# Altium PCB GN_main.PcbDoc
Units mm, origin at the board's own origin, x right, y up, seen from the top; angles counter-clockwise.
Board outline 10.29 x 24.43 mm, 2 copper layers (Top Layer, Bottom Layer), stack 1.071 mm thick; 9 components, 8 nets, 35 pads, 0 vias.
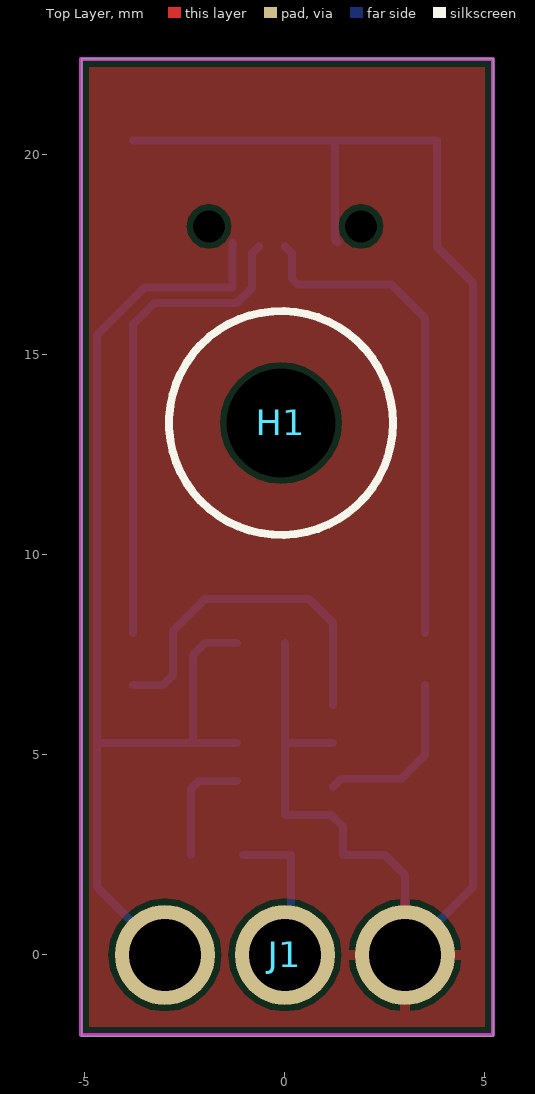
[diagram p0: Top Layer view]
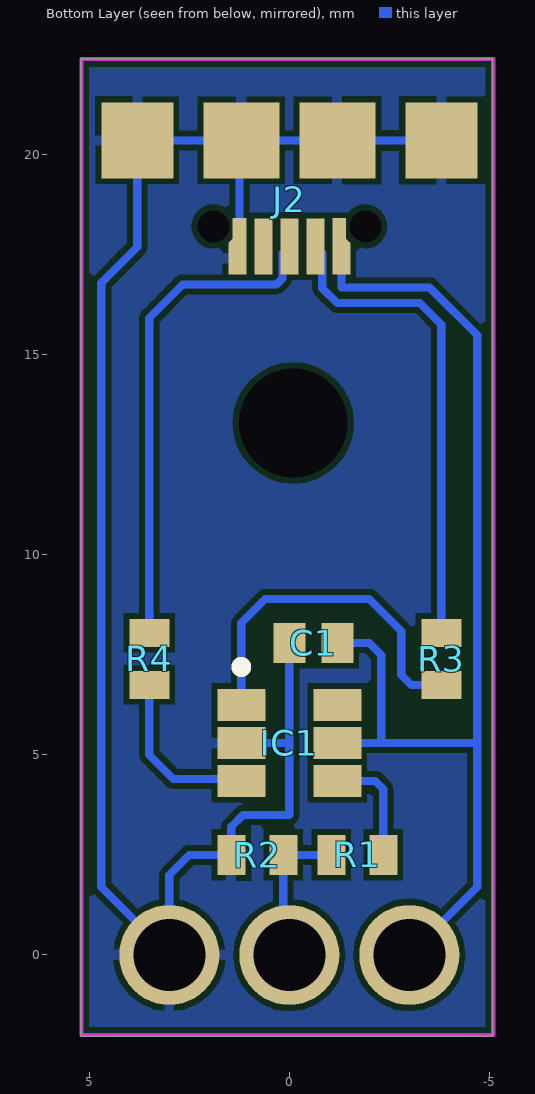
[diagram p1: Bottom Layer view, seen from below]

## Layer stack, top to bottom
Top Solder: solder mask 0.0102, Solder Resist, Dk 3.5
Top Layer: signal copper 0.0356
Dielectric1: core 1, FR-4, Dk 4.8
Bottom Layer: signal copper 0.0356
Bottom Solder: solder mask 0.0102, Solder Resist, Dk 3.5

## Board outline
-5.08,-2.032 -5.08,22.4 5.207,22.4 5.207,-2.032

## Design rules (kind name [scope] priority, off if disabled: settings)
Clearance [All] p1: gap=0.15
PolygonConnect [All] p1: connectstyle=Relief reliefconductorwidth=0.254 reliefentries=4 polygonreliefangle="90 Angle" airgapwidth=0.254
RoutingVias [All] p1: holewidth=0.635 width=1.016 viastyle="Through Hole" minholewidth=0.711 minwidth=1.27 maxholewidth=0.711 maxwidth=1.27
SilkToSolderMaskClearance SilkscreenOverComponentPads [IsPad] p1: minsilkscreentomaskgap=0.254 clearancetoexposedcopper=TRUE
SolderMaskExpansion [All] p1: expansion=0.102
UnpouredPolygon [All] p1: allowunpoured=FALSE
Width [All] p1: maxlimit=0.5 minlimit=0.15 preferedwidth=0.203 toplayer_prefwidth=0.2 bottomlayer_minwidth=0.203 bottomlayer_maxwidth=0.203 minimp=50.000000 maximp=50.000000 favimp=50.000000
28 further rules are at their usual default settings.

## Components (designator, comment, footprint, x,y, rotation, side; value= is the part's Value field where it differs from the comment)
C1 "C0603" C0603 -0.6,7.8 r0 bottom
H1 "MHole2.7mm-UNPLATED" MHole2_7mm-UNPLATED -0.1,13.3 r0 top
IC1 "Atmel AVR ATtiny10" SOT23-6 0,5.3 r180 bottom
J1 "GN_3Pin" GN_3PIN 0,0 r180 top locked
J2 "USB_micro_AB" USB_micro_AB 0,20.34 r0 bottom
R1 "R0603" R0603 -1.7,2.5 r180 bottom
R2 "R0603" R0603 0.8,2.5 r0 bottom
R3 "R0603" R0603 -3.8,7.4 r270 bottom
R4 "R0603" R0603 3.5,7.4 r90 bottom

## Footprints (in the part's own frame and the unit in brackets; to place one, negate y for a bottom-side part, rotate by r counter-clockwise, add the part's x,y. Pads: shape width x height; smd on the part's side, far side on the other; paste and mask are expansions set on the pad)
C0603 [mm]
  rect 0.8x1 smd: 1(-0.6,0) 2(0.6,0)
  body extent -0.87,-0.48 0.87,0.48, height 0.95
GN_3PIN [mm] "Galaxy Nexus 3Pin"
  round 2.5 hole 1.8: 1(-3,0) 2(0,0) 3(3,0)
  body extent -86.99,-9.33 48.51,3.05, height 72.39
MHole2_7mm-UNPLATED [mm]
  round 0 hole 2.72 unplated: 1(0,0)
  silkscreen extent -2.8,-2.8 2.8,2.8, body extent -2.75,-2.74 2.73,2.74, height 0.02
R0603 [mm]
  rect 0.7x1 smd: 1(-0.65,0) 2(0.65,0)
  body extent -0.82,-0.48 0.82,0.48, height 0.5
SOT23-6 [mm]
  rect 1.2x0.8 smd: 1(-1.2,0.95) 2(-1.2,0) 3(-1.2,-0.95) 4(1.2,-0.95) 5(1.2,0) 6(1.2,0.95)
  silkscreen extent -1.33,1.78 -1.08,2.02, body extent -1.5,-1.5 1.5,1.5, height 1.45
USB_micro_AB [mm]
  rect 0.3x0.3 smd rot 45: 1(-1.31,2.53) 5(1.31,2.53)
  rect 0.45x0.8 smd: 1(-1.3,2.925) 5(1.3,2.925)
  rect 0.34x1.4 smd: 1(-1.245,2.62) 5(1.245,2.62)
  rect 0.45x1.4 smd: 2(-0.65,2.625) 3(0,2.625) 4(0.65,2.625)
  rect 1.8x1.9 smd: 6(-3.8,-0.025) 6(3.8,-0.025)
  rect 1.9x1.9 smd: 6(-1.2,-0.025) 6(1.2,-0.025)
  round 0 hole 0.8 unplated mask+0.5: ""(-1.9,2.125) ""(1.9,2.125)
  body extent -3.97,-2.58 4.01,2.85, height 2.72

## Part data
C1: "capacitor"
H1: library part 22899, "MHole2.7mm-unplated"
IC1: library part ATtiny10, "ATtiny10"
J2: "5-pin Female SMT USB mini-AB (OTG) Receptacle Molex"
R1 R2 R3 R4: "Resistor"

## Nets (pads, with @x,y where several pads share a name; then routed paths per layer and width w, separated by ;. In a path a pad name is that pad's centre, name@x,y a point inside that pad or via, vN(x,y) a via of type N, cw(c..) or ccw(c..) an arc to the next point about the centre after c; other vN are vias at no path point)
GND: C1.2 IC1.2 J1.1 J2.5 J2.6 R2.2 | length 43.1
  Bottom Layer w0.203: J2.6@-3.8,20.365 J2.6@1.2,20.365 ; C1.2 0,3.5 1.155,3.5 1.45,3.205 R2.2 2.5,2.5 3,2 J1.1 4.7,1.7 4.7,16.8 3.8,17.7 3.8,20.365 J2.6@1.2,20.365 ; 0.1,5.3 IC1.2 ; J2.5@1.31,17.81 1.248,17.872 1.248,20.317 J2.6@1.2,20.365
NetC1_1: C1.1 IC1.5 J1.3 J2.1 | length 28.1
  Bottom Layer w0.203: J1.3 -4.7,1.7 -4.7,5.3 ; J2.1@-1.31,17.81 -1.31,16.69 -3.51,16.69 -4.7,15.5 -4.7,5.3 ; IC1.5 -2.3,5.3 ; C1.1 -2,7.8 -2.3,7.5 -2.3,5.3 ; -4.7,5.3 -2.3,5.3
NetIC1_1: IC1.1 R3.2 | length 8.8
  Bottom Layer w0.203: R3.2 -3.05,6.75 -2.8,7 -2.8,8.1 -2,8.9 0.6,8.9 1.2,8.3 IC1.1
NetIC1_3: IC1.3 R4.1 | length 4.4
  Bottom Layer w0.203: IC1.3@1.2,4.2 1.4,4.4 2.9,4.4 3.5,5 R4.1
NetIC1_4: IC1.4 R1.2 | length 2.9
  Bottom Layer w0.203: R1.2 -2.35,4.15 -2.15,4.35 IC1.4
NetJ1_2: J1.2 R1.1 R2.1 | length 3.8
  Bottom Layer w0.203: R1.1 R2.1 0.15,0.15 J1.2
NetJ2_2: J2.2 R3.1 | length 12.2
  Bottom Layer w0.203: R3.1 -3.8,15.763 -3.263,16.3 -1.201,16.3 -0.823,16.677 -0.823,17.542 J2.2
NetJ2_3: J2.3 R4.2 | length 12.5
  Bottom Layer w0.203: J2.3 0.173,17.542 0.173,16.911 0.321,16.764 2.664,16.764 3.5,15.928 R4.2
pads on no net: H1.1 IC1.6 J2. J2.4

## Polygon pours and split planes (outlines as drawn)
GND on Top Layer "Top Layer-No Net" (solid, remove dead copper, pour order 2): -6.2,22.8 -5.7,23.3 7.1,23.3 7.1,-4.3 6.2,-5.2 4.8,-3.8 -7.1,-3.8
GND on Bottom Layer "Top Layer-No Net" (solid, remove dead copper, pour order 8): -6.7,25.5 6.4,25.5 8.3,23.6 6.2,21.5 6.2,-3.2 -8.2,-3.2 -8.3,-3.1

## Keep-outs
Keep-Out Layer:
  lines w0.1: -5.1,-2 -5.1,22.4 5.2,22.4 5.2,-2 -5.1,-2

## Silkscreen, mask and mechanical layers (free items; w line width, h text height)
Mechanical 6:
  the board outline again, w0.254